# Altium PCB PCB GYRO REPETE-REVISI.PcbDoc
Units mm, origin at the board's own origin, x right, y up, seen from the top; angles counter-clockwise.
Board outline 122.05 x 86.61 mm, 2 copper layers (Top Layer, Bottom Layer); 63 components, 57 nets, 236 pads, 10 vias.
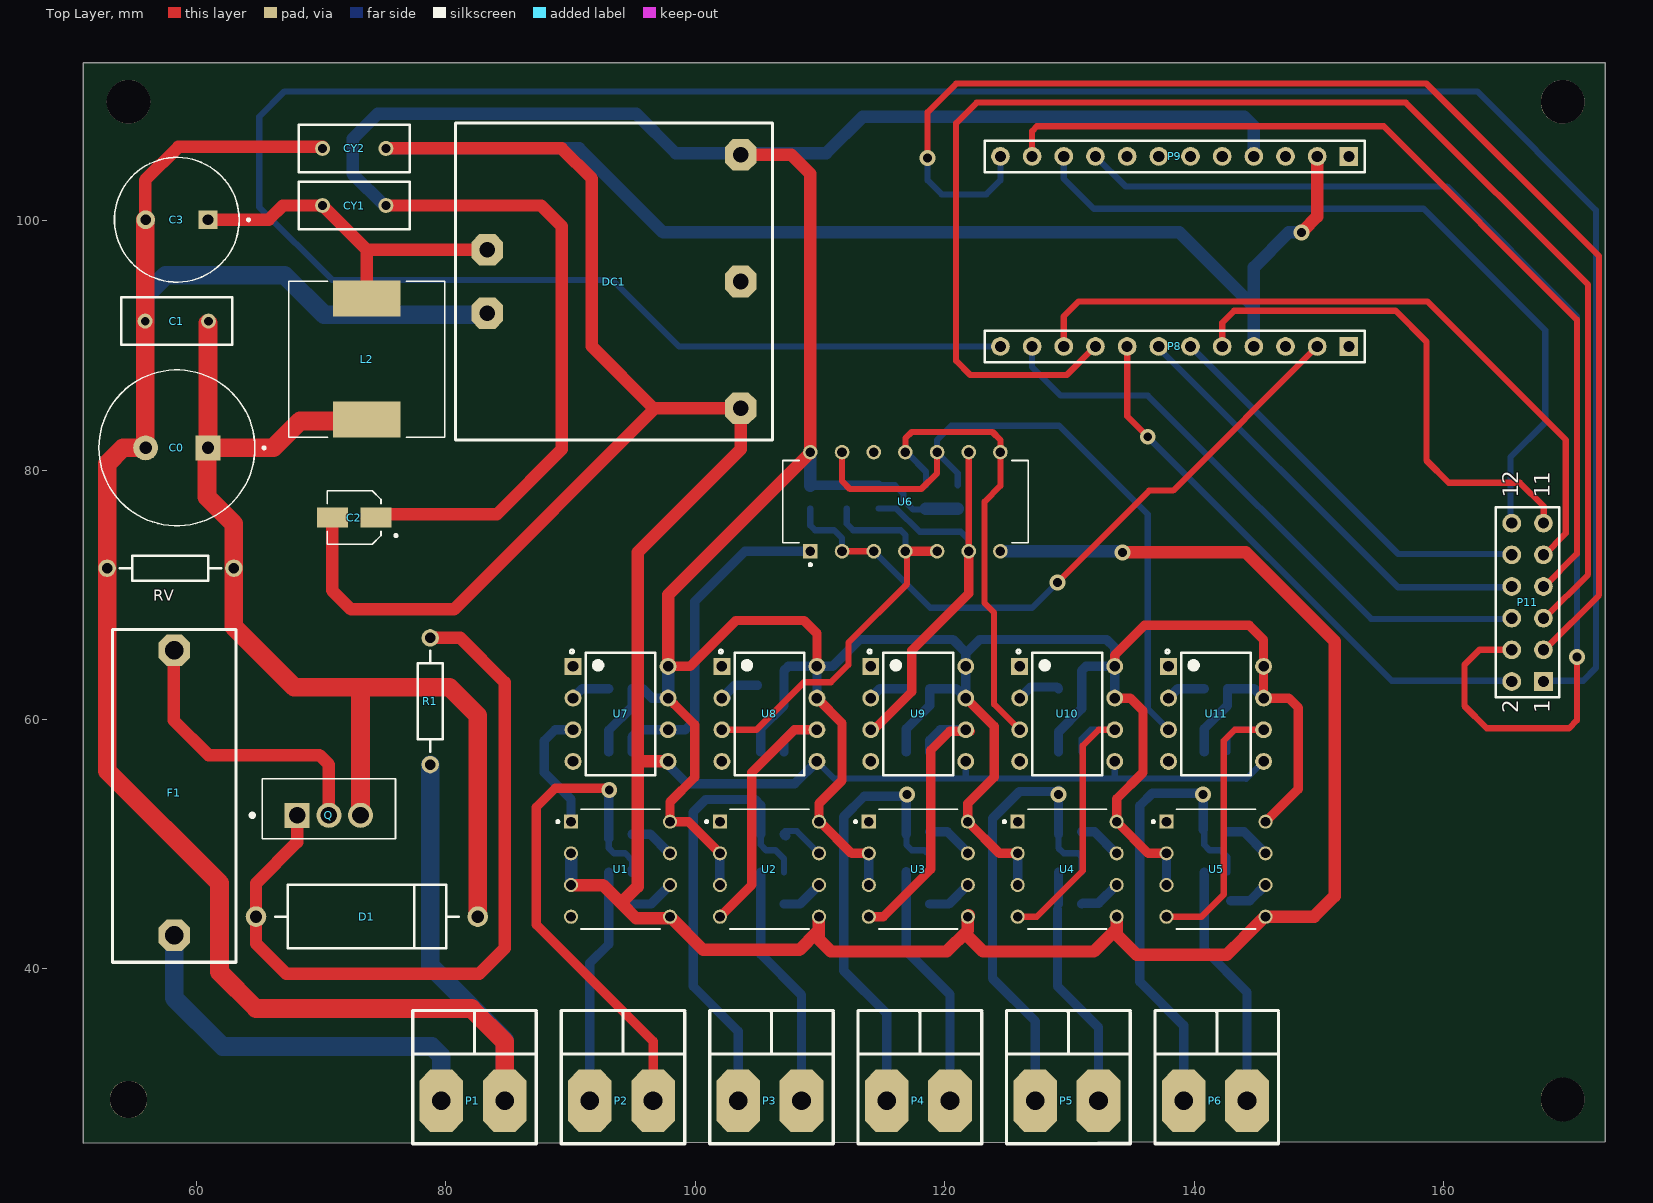
[diagram p0: Top Layer view]
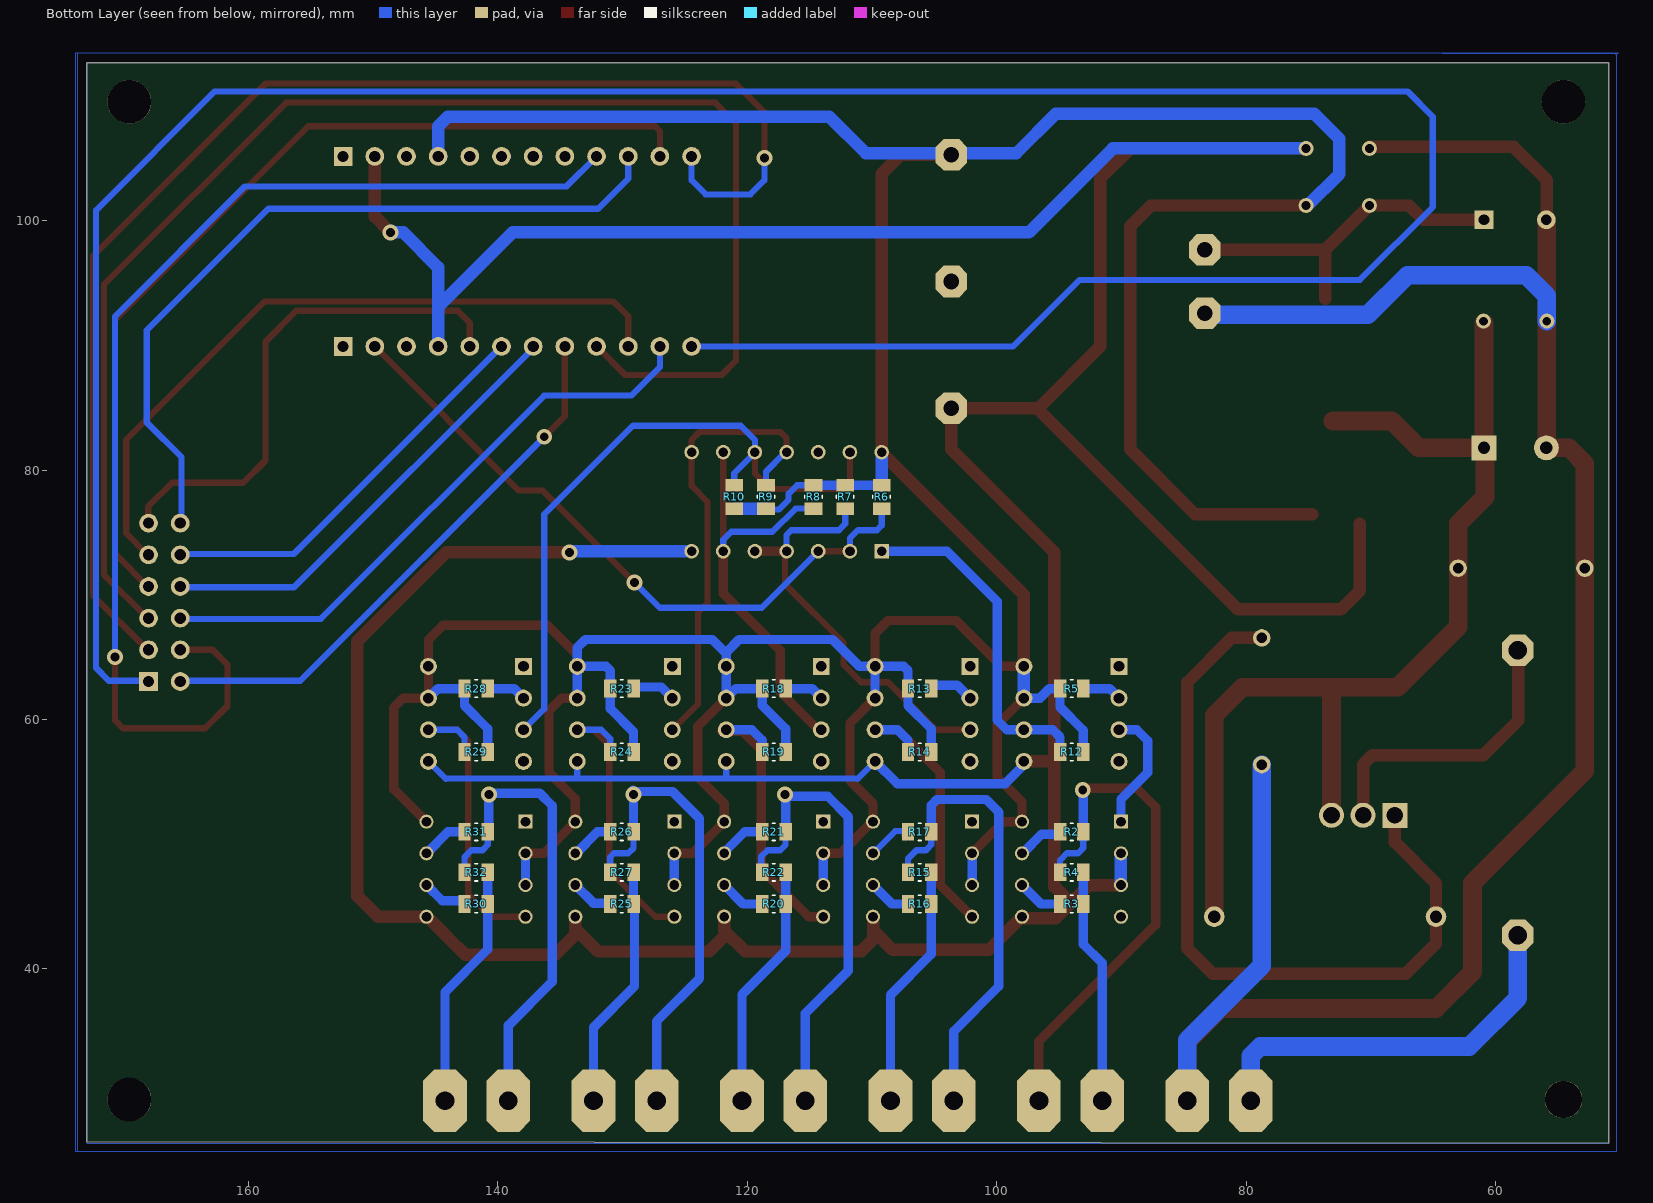
[diagram p1: Bottom Layer view, seen from below]

## Layer stack, top to bottom
Top Layer: signal copper 0.0356
Dielectric: dielectric 0.32, FR-4, Dk 4.8
Bottom Layer: signal copper 0.0356

## Board outline
172.974,112.649 172.974,26.161 50.927,26.035 50.927,112.649

## Design rules (kind name [scope] priority, off if disabled: settings)
Clearance Clearance_1 [All] p1: gap=0.254
Clearance [All] p2: gap=0.254
Height [All] p1: minheight=0 maxheight=76 prefheight=12.7
HoleSize [All] p1: absolutevalues=TRUE maxlimit=3.5 minlimit=0.025 maxpercent=80.000 minpercent=20.000
PolygonConnect [All] p1: connectstyle=Relief reliefconductorwidth=0.254 reliefentries=4 polygonreliefangle="90 Angle"
RoomDefinition "PCB GYRO REPETER" [InComponentClass('PCB GYRO REPETER')] p1: confinementstyle=ConfineIn formatcopy=TRUE lockcomponents=FALSE outline 186.817,18.161 41.91,18.161 41.91,120.904 186.817,120.904
RoutingVias [All] p1: holewidth=0.711 width=1.27 viastyle="Through Hole" minholewidth=0.711 minwidth=1.27 maxholewidth=0.711 maxwidth=1.27
SilkToSilkClearance [All] p1: silktosilkclearance=0.104
SilkscreenOverComponentPads [All] p1: minsilkscreentomaskgap=0.104
SolderMaskExpansion [All] p1: expansion=0.116
Width [All] p1: maxlimit=2 minlimit=0.254 preferedwidth=0.5 minimp=50.000000 maximp=50.000000 favimp=50.000000
24 further rules are at their usual default settings.

## Components (designator, comment, footprint, x,y, rotation, side; value= is the part's Value field where it differs from the comment)
C0 "1000uf 50" CAPPRD500W60D1250H2500 58.42,81.788 r180 top
C1 "Cap" RAD-0.2 58.42,91.948 r0 top
C2 "EEEFP1C100AR" CAP_EEEFP1C100AR 72.644,76.2 r180 top
C3 "330uf50" CAPPRD500W60D1000H2000 58.42,100.076 r180 top
CY1 "Cap" RAD-0.2 72.644,101.219 r180 top
CY2 "Cap" RAD-0.2 72.644,105.791 r180 top
D1 "D Zener" DIODE-0.7 73.66,44.196 r0 top
DC1 "MORNSUN DC DC" "DC DC MORNSUN" 85.344,95.504 r0 top
F1 "FUSE-HOLDER" Fuse-Holder 46.228,50.8 r0 top
L2 "SRR1240-101M" IND_SRR1240-101M 73.66,88.9 r270 top
P1 "PWR" Terminal-blok 6.6,97.5 r0 top
P2 "INPUT" Terminal-blok 18.505,97.5 r0 top
P3 "OUT-1" Terminal-blok 30.409,97.5 r0 top
P4 "OUT-2" Terminal-blok 42.314,97.5 r0 top
P5 "OUT-3" Terminal-blok 54.22,97.5 r0 top
P6 "OUT-4" Terminal-blok 66.124,97.5 r0 top
P8 "Header 12" HDR1X12 152.4,89.916 r180 top
P9 "Header 12" HDR1X12 152.4,105.156 r180 top
P11 "Header 6X2" HDR2X6 168,63.05 r90 top
Q "FQP47P06" TO254P1067X483X2286-3 68.072,52.324 r0 top
R1 "Res2" AXIAL-0.4 78.74,61.468 r90 top
R2 "1623401-1" RESC2012X65N 93.98,51 r0 bottom
R3 "1623401-1" RESC2012X65N 93.98,45.212 r0 bottom
R4 "1623401-1" RESC2012X65N 93.98,47.752 r180 bottom
R5 "1623401-1" RESC2012X65N 93.98,62.484 r0 bottom
R6 "1623401-1" RESC2012X65N 109.22,77.851 r90 bottom
R7 "1623401-1" RESC2012X65N 112.141,77.851 r90 bottom
R8 "1623401-1" RESC2012X65N 114.681,77.851 r90 bottom
R9 "1623401-1" RESC2012X65N 118.491,77.851 r270 bottom
R10 "1623401-1" RESC2012X65N 121.031,77.851 r270 bottom
R12 "1623401-1" RESC2012X65N 93.98,57.404 r180 bottom
R13 "1623401-1" RESC2012X65N 106.172,62.484 r0 bottom
R14 "1623401-1" RESC2012X65N 106.172,57.404 r180 bottom
R15 "1623401-1" RESC2012X65N 106.172,47.752 r0 bottom
R16 "1623401-1" RESC2012X65N 106.172,45.212 r180 bottom
R17 "1623401-1" RESC2012X65N 106.172,51 r180 bottom
R18 "1623401-1" RESC2012X65N 117.856,62.484 r0 bottom
R19 "1623401-1" RESC2012X65N 117.856,57.404 r180 bottom
R20 "1623401-1" RESC2012X65N 117.856,45.212 r180 bottom
R21 "1623401-1" RESC2012X65N 117.856,51 r180 bottom
R22 "1623401-1" RESC2012X65N 117.856,47.752 r0 bottom
R23 "1623401-1" RESC2012X65N 130.048,62.484 r0 bottom
R24 "1623401-1" RESC2012X65N 130.048,57.404 r180 bottom
R25 "1623401-1" RESC2012X65N 130.048,45.212 r180 bottom
R26 "1623401-1" RESC2012X65N 130.048,51 r180 bottom
R27 "1623401-1" RESC2012X65N 130.048,47.752 r0 bottom
R28 "1623401-1" RESC2012X65N 141.732,62.484 r180 bottom
R29 "1623401-1" RESC2012X65N 141.732,57.404 r0 bottom
R30 "1623401-1" RESC2012X65N 141.732,45.212 r0 bottom
R31 "1623401-1" RESC2012X65N 141.732,51 r0 bottom
R32 "1623401-1" RESC2012X65N 141.732,47.752 r180 bottom
RV "Res Varistor" AXIAL-0.4 57.912,72.136 r0 top
U1 "SN75176BP" DIP794W45P254L959H508Q8 94,48 r0 top
U2 "SN75176BP" DIP794W45P254L959H508Q8 105.938,48 r0 top
U3 "SN75176BP" DIP794W45P254L959H508Q8 117.874,48 r0 top
U4 "SN75176BP" DIP794W45P254L959H508Q8 129.812,48 r0 top
U5 "SN75176BP" DIP794W45P254L959H508Q8 141.75,48 r0 top
U6 "SN7407N" DIP794W45P254L1969H508Q14 116.84,77.47 r90 top
U7 "6N137" DIP762W50P254L977H451Q8 94,60.452 r0 top
U8 "6N137" DIP762W50P254L977H451Q8 105.938,60.452 r0 top
U9 "6N137" DIP762W50P254L977H451Q8 117.874,60.452 r0 top
U10 "6N137" DIP762W50P254L977H451Q8 129.812,60.452 r0 top
U11 "6N137" DIP762W50P254L977H451Q8 141.75,60.452 r0 top

## Footprints (in the part's own frame and the unit in brackets; to place one, negate y for a bottom-side part, rotate by r counter-clockwise, add the part's x,y. Pads: shape width x height; smd on the part's side, far side on the other; paste and mask are expansions set on the pad)
AXIAL-0.4 [mm] "Axial Device, Thru-Hole; 2 Leads; 0.4 in Pin Spacing"
  round 1.4 hole 0.85: 1(-5.08,0) 2(5.08,0)
  silkscreen extent -4.06,-1.02 4.06,1.02
CAP_EEEFP1C100AR [mm]
  rect 2.5x1.6 smd: 1(-1.75,0) 2(1.75,0)
  silkscreen extent -3.45,-2.15 2.15,2.15, body extent -2.5,-2.15 2.5,2.15, height 5.3
CAPPRD500W60D1000H2000 [mm]
  round 1.5 hole 0.85: N(2.5,0)
  rect 1.5x1.5 hole 0.85: P(-2.5,0)
  silkscreen extent -5.85,-5 5,5, body extent -5,-5 5,5, height 20
CAPPRD500W60D1250H2500 [mm]
  round 2 hole 1: N(2.5,0)
  rect 2x2 hole 1: P(-2.5,0)
  silkscreen extent -7.1,-6.25 6.25,6.25, body extent -6.25,-6.25 6.25,6.25, height 25
"DC DC MORNSUN" [mil]
  oct 100x100 hole 49.21: 1(-80,-115) 2(-80,85) 3(720,385) 4(720,-15) 5(720,-415)
  silkscreen extent -180,-515 820,485
DIODE-0.7 [mm] "Diode, Thru-Hole; 2 Leads; 0.7 in Pin Spacing"
  round 1.65 hole 1: 1(-8.89,0) 2(8.89,0)
  silkscreen extent -7.37,-2.54 7.37,2.54
DIP762W50P254L977H451Q8 [mm]
  rect 1.35x1.35 hole 0.85: 1(-3.81,3.81)
  round 1.35 hole 0.85: 2(-3.81,1.27) 3(-3.81,-1.27) 4(-3.81,-3.81) 5(3.81,-3.81) 6(3.81,-1.27) 7(3.81,1.27) 8(3.81,3.81)
  silkscreen extent -4.04,-4.9 2.8,5.14
DIP794W45P254L959H508Q8 [mm]
  rect 1.13x1.13 hole 0.78: 1(-3.97,3.81)
  round 1.13 hole 0.78: 2(-3.97,1.27) 3(-3.97,-1.27) 4(-3.97,-3.81) 5(3.97,-3.81) 6(3.97,-1.27) 7(3.97,1.27) 8(3.97,3.81)
  silkscreen extent -5.13,-4.79 3.17,4.79, body extent -4.79,-5.46 4.79,5.46, height 5.08
DIP794W45P254L1969H508Q14 [mm]
  rect 1.17x1.17 hole 0.77: 1(-3.97,7.62)
  round 1.17 hole 0.77: 2(-3.97,5.08) 3(-3.97,2.54) 4(-3.97,0) 5(-3.97,-2.54) 6(-3.97,-5.08) 7(-3.97,-7.62) 8(3.97,-7.62) 9(3.97,-5.08) 10(3.97,-2.54) 11(3.97,0) 12(3.97,2.54) 13(3.97,5.08) 14(3.97,7.62)
  silkscreen extent -5.15,-9.84 3.3,9.84
Fuse-Holder [mm]
  oct 2.5x2.5 hole 1.5: 1(11.99,14.764) 2(11.99,-8.096)
  silkscreen extent 7.04,-10.26 16.94,16.41
HDR1X12 [mm] "Connector; Header; 12 Position"
  rect 1.5x1.5 hole 0.9: 1(0,0)
  round 1.5 hole 0.9: 2(2.54,0) 3(5.08,0) 4(7.62,0) 5(10.16,0) 6(12.7,0) 7(15.24,0) 8(17.78,0) 9(20.32,0) 10(22.86,0) 11(25.4,0) 12(27.94,0)
  silkscreen extent -1.27,-1.27 29.21,1.27
HDR2X6 [mm] "Connector; Header; 6x2 Position"
  rect 1.5x1.5 hole 0.9: 1(0,0)
  round 1.5 hole 0.9: 2(0,2.54) 3(2.54,0) 4(2.54,2.54) 5(5.08,0) 6(5.08,2.54) 7(7.62,0) 8(7.62,2.54) 9(10.16,0) 10(10.16,2.54) 11(12.7,0) 12(12.7,2.54)
  silkscreen extent -1.27,-1.27 13.97,3.81
IND_SRR1240-101M [mm]
  rect 2.9x5.4 smd: 1(-4.85,0) 2(4.85,0)
  silkscreen extent -6.25,-6.25 6.25,6.25
RAD-0.2 [mm] "Radial Cap, Thru-Hole; 2 Leads; 0.2 in Pin Spacing"
  round 1.2 hole 0.7: 1(-2.54,0) 2(2.54,0)
  silkscreen extent -4.44,-1.91 4.44,1.91
RESC2012X65N [mm]
  rect 1x1.42 smd: 1(-0.935,0) 2(0.935,0)
  silkscreen extent -0.12,-0.7 0.12,0.7
Terminal-blok [mm]
  oct 3.5x5 hole 1.5: 1(73.025,-68.072) 2(78.105,-68.072)
  silkscreen extent 70.74,-71.51 80.64,-60.83
TO254P1067X483X2286-3 [mm]
  rect 2.01x2.01 hole 1.34: 1(0,0)
  round 2.01 hole 1.34: 2(2.54,0) 3(5.08,0)
  silkscreen extent -3.74,-1.89 7.88,2.95

## Part data
C0: library part EEUHD1H102B, "CAP ALUM 1000UF 20% 50V RADIAL"
C1 CY1 CY2: "Capacitor"
C2: "10µF 16V Aluminum Electrolytic Capacitors Radial, Can - SMD 850mOhm @ 100kHz 2000 Hrs @ 105°C"
C3: library part EEUFS1H331B, "CAP ALUM 330UF 20% 50V RADIAL"
D1: "Zener Diode"
DC1: library part "DC-DC MORNSUN"
L2: "100µH Shielded Wirewound Inductor 1.25A 300mOhm Max Nonstandard"
P1 P2 P3 P4 P5 P6: library part "Header 2", "Header, 2-Pin"
P8 P9: "Header, 12-Pin"
P11: "Header, 6-Pin, Dual row"
Q: "P-Channel 60V 47A _Tc_ 160W _Tc_ Through Hole TO-220-3"
R1: "Resistor"
R2 R3 R4 R5 R6 R7 R8 R9 R10 R12 R13 R14 R15 R16 R17 R18 R19 R20 R21 R22 R23 R24 R25 R26 R27 R28 R29 R30 R31 R32: library part CRG0805ZR, "Res Thick Film 0805 0 Ohm Molded SMD SMD T/R"
RV: "Varistor (Voltage-Sensitive Resistor)"
U1 U2 U3 U4 U5: "Differential bus transceiver 8-PDIP 0 to 70"
U6: "Búferes / controladores hexagonales con salidas de alto voltaje de colector abierto 14-PDIP 0 a 70"
U7 U8 U9 U10 U11: "Optoaislador de salida lógica 10Mbps Open Collector 5000Vrms 1 Channel 5kV / µs CMTI 8-DIP"

## Free pads (board coordinates)
  round 3 hole 3: 0(54.545,29.535)
  round 3.5 hole 3.5: 0(54.545,109.535) 0(169.54,29.535) 0(169.54,109.535)

## Via types
v1: diameter 1.27, hole 0.711, Top Layer to Bottom Layer, 9 vias
v2: diameter 1.27, hole 0.711, Top Layer to Bottom Layer, tented both sides, 1 vias

## Nets (pads, with @x,y where several pads share a name; then routed paths per layer and width w, separated by ;. In a path a pad name is that pad's centre, name@x,y a point inside that pad or via, vN(x,y) a via of type N, cw(c..) or ccw(c..) an arc to the next point about the centre after c; other vN are vias at no path point)
-VIN: C0.N C1.1 C3.N CY2.2 DC1.1 P1.2 R1.1 RV.1 | length 176.7
  Top Layer w1: C3.N@55.88,99.949 55.88,100.076 55.88,103.251 58.547,105.918 CY2.2@70.104,105.918
  Top Layer w1.5: RV.1@52.832,71.882 52.832,55.88 61.849,46.863 61.849,39.751 64.77,36.83 82.042,36.83 84.705,34.167 P1.2 P1.2@84.705,28.928 ; RV.1 52.832,80.518 54.102,81.788 C0.N@56.007,81.788 ; C0.N@55.88,81.788 C1.1 C3.N@55.88,100.076
  Bottom Layer w1.5: C1.1 55.88,93.98 57.531,95.631 67.056,95.631 70.231,92.456 DC1.1@83.312,92.456 ; R1.1 78.74,40.259 84.705,34.294 P1.2@84.705,28.928
A: P9.9 P11.4 | length 93.9
  Top Layer w0.5: P11.4 162.872,65.59 161.671,64.389 161.671,61.087 163.449,59.309 170.053,59.309 170.688,59.944 v1(170.688,65.024)
  Bottom Layer w0.5: P9.9 134.493,102.743 160.274,102.743 170.688,92.329 v1(170.688,65.024)
B: P9.10 P11.12 | length 62
  Bottom Layer w0.5: P9.10 129.54,103.378 131.953,100.965 158.392,100.965 168.148,91.209 168.148,83.82 165.354,81.026 P11.12@165.354,75.819
C: P9.11 P11.7 | length 74.9
  Top Layer w0.5: P9.11 127,107.188 127.381,107.569 155.194,107.569 170.688,92.075 170.688,73.279 P11.7@168.021,70.612
D: P9.12 P11.3 | length 108.5
  Top Layer w0.5: v1@118.618,104.902 v1(118.618,105.029) 118.618,108.712 120.904,110.998 158.623,110.998 172.466,97.155 172.466,69.977 168.148,65.659 P11.3@167.767,65.659
  Bottom Layer w0.5: v1(118.618,105.029) 118.618,103.251 119.761,102.108 123.317,102.108 124.46,103.251 P9.12
DATA-IN: R12.1 U6.1 U7.6 | length 27.3
  Bottom Layer w0.75: R12.1 94.915,58.593 95.504,59.182 U7.6 99.187,59.182 99.949,59.944 99.949,69.469 103.98,73.5 U6.1 U6.1@109.22,73.533
DATA_OUT1: P8.2 R6.1 U6.2 U6.3 | length 53.4
  Top Layer w0.5: U6.2 U6.3@114.206,73.5 ; v1@129.286,71.247 136.398,78.359 138.303,78.359 P8.2
  Bottom Layer w0.5: R6.1 109.22,75.565 109.601,75.184 111.125,75.184 111.76,74.549 U6.2@111.76,73.533 ; U6.3 118.839,68.961 127,68.961 v1@128.905,70.866
  other v1: 129.032,70.993
DATA_OUT2: R7.1 U6.4 U6.5 U8.3 | length 33.6
  Top Layer w0.5: U8.3 104.902,59.182 108.712,62.992 110.871,62.992 112.268,64.389 112.268,66.167 116.967,70.866 116.967,73.5 U6.4@116.967,73.533
  Top Layer w0.75: U6.4 116.967,73.5 U6.5@119.347,73.5
  Bottom Layer w0.5: R7.1 112.141,75.692 112.649,75.184 116.459,75.184 116.84,74.803 U6.4 U6.4@116.84,73.406
DATA_OUT3: R8.1 U6.6 U6.9 U9.3 | length 34.6
  Top Layer w0.5: U6.6@121.92,73.406 U6.6 U6.9
  Top Layer w0.75: U9.3 114.3,59.182 117.348,62.23 117.348,65.532 121.92,70.104 U6.6@121.92,73.406 ; U6.6 U6.6@121.92,73.533
  Bottom Layer w0.5: R8.1 116.124,76.916 117.983,75.057 121.285,75.057 121.92,74.422 U6.6@121.92,73.787
DATA_OUT4: R9.1 U6.8 U6.11 U10.3 | length 37.1
  Top Layer w0.5: U6.11 116.84,82.55 117.348,83.058 123.825,83.058 124.46,82.423 U6.8@124.46,81.534 ; U6.8@124.46,81.407 124.46,78.74 123.19,77.47 123.19,69.342 123.952,68.58 123.952,61.232 U10.3
  Bottom Layer w0.5: U6.11@117.094,81.28 118.491,79.883 R9.1
DATA_OUT5: R10.1 U6.10 U6.13 U11.3 | length 54.9
  Top Layer w0.5: U6.13@111.76,81.407 111.76,79.121 112.395,78.486 118.11,78.486 119.38,79.756 U6.10
  Bottom Layer w0.5: U6.10 119.38,82.423 120.523,83.566 129.159,83.566 136.271,76.454 136.271,73.914 ; U6.10@119.507,81.28 121.031,79.756 R10.1 ; 136.271,74.041 136.271,73.914 ; U11.3 136.271,60.851 136.271,73.914
DIG1: P8.8 P11.2 | length 45.1
  Top Layer w0.5: P8.8 134.62,84.328 136.207,82.74 v2@136.334,82.74
  Bottom Layer w0.5: v2@136.334,82.614 155.829,63.119 P11.2@165.354,63.119
  other v2: 136.271,82.677
DIG2: P8.7 P11.8 | length 36.4
  Bottom Layer w0.5: P8.7 137.16,89.789 156.337,70.612 P11.8@165.481,70.612
DIG3: P8.6 P11.10 | length 32.7
  Bottom Layer w0.5: P8.6 156.337,73.279 P11.10@165.481,73.279
DIG4: P8.5 P11.11 | length 41.6
  Top Layer w0.5: P8.5 142.24,91.821 143.192,92.773 156.147,92.773 158.623,90.297 158.623,80.772 160.401,78.994 166.116,78.994 168.021,77.089 P11.11@168.021,75.692
DP: P8.9 P11.5 | length 117.4
  Top Layer w0.5: P8.9 129.794,87.63 122.047,87.63 120.904,88.773 120.904,107.823 122.555,109.474 156.972,109.474 171.577,94.869 171.577,71.628 168.148,68.199 P11.5@167.894,68.199
E: P8.12 P11.1 | length 224.6
  Bottom Layer w0.5: P8.12 98.679,89.916 93.345,95.25 70.866,95.25 65.024,101.092 65.024,108.331 67.056,110.363 162.687,110.363 172.212,100.838 172.212,64.135 171.196,63.119 P11.1@168.021,63.119
F: P8.11 P11.6 | length 48.5
  Bottom Layer w0.5: P8.11 127,88.265 129.286,85.979 136.271,85.979 154.178,68.072 P11.6@165.481,68.072
G: P8.10 P11.9 | length 57.8
  Top Layer w0.5: P8.10 129.54,92.329 130.738,93.527 158.695,93.527 169.799,82.423 169.799,74.93 P11.9@168.021,73.152
GND: C2.2 CY2.1 DC1.5 P8.4 P9.2 U1.2 U1.3 U1.5 U2.5 U3.5 U4.5 U5.5 U6.7 U7.5 U8.5 U9.5 U10.5 U11.5 | length 401
  Top Layer w1: C2.2@70.866,75.692 70.866,70.358 72.39,68.834 80.645,68.834 96.774,84.963 ; CY2.1 89.281,105.791 91.694,103.378 91.694,89.916 96.647,84.963 96.774,84.963 ; U1.3 92.589,46.73 94.043,45.276 ; 95.377,53.086 95.377,46.609 94.043,45.276 ; 95.377,53.213 95.377,56.642 ; U1.5@97.849,44.069 95.25,44.069 94.043,45.276 ; U7.5@97.917,56.642 U7.5 95.377,56.642 ; U1.5 100.631,41.529 108.331,41.529 109.728,42.926 ; U2.5 109.908,42.365 110.871,41.402 120.142,41.402 121.844,43.104 U3.5 ; 121.844,42.621 123.063,41.402 131.953,41.402 133.731,43.18 ; U3.5@121.92,44.19 U3.5@121.92,44.323 ; U4.5@133.731,44.19 U4.5@133.731,44.196 ; U4.5 133.782,42.748 135.382,41.148 142.621,41.148 144.018,42.545 ; v1@134.239,73.279 134.366,73.406 144.145,73.406 151.257,66.294 151.257,45.847 149.606,44.196 145.669,44.196 144.145,42.672 ; v1@148.717,99.187 149.86,100.33 P9.2 ; 95.377,56.642 95.377,73.406 103.632,81.661 DC1.5 96.774,84.963
  Bottom Layer w0.5: U8.5 111.145,55.245 ; 111.179,55.279 133.622,55.279 ; 121.684,55.449 U9.5 ; U10.5 133.622,55.279 ; 144.129,55.279 133.622,55.279 ; 144.163,55.245 U11.5
  Bottom Layer w0.75: U7.5@97.81,56.495 U7.5 97.81,56.368 99.314,54.864 107.97,54.864 U8.5
  Bottom Layer w1: CY2.1 90.678,105.791 97.409,99.06 138.811,99.06 144.78,93.091 ; U1.3 U1.2 ; U6.7 v1@134.018,73.5 ; P8.4 144.78,93.091 ; v1@148.59,99.187 v1(148.59,99.06) 147.574,99.06 144.78,96.266 144.78,93.091
  other v1: 134.239,73.406
NetC0_P: C0.P C1.2 D1.2 L2.2 Q.3 RV.2 | length 87.3
  Top Layer w1.5: C1.2@60.92,91.781 C0.P@60.92,81.875 ; C0.P@60.96,81.915 C0.P@60.92,81.875 ; L2.2@73.025,83.947 68.326,83.947 66.167,81.788 C0.P C0.P@60.92,81.875 ; Q.3 73.152,62.588 ; D1.2 82.55,60.325 80.287,62.588 73.152,62.588 ; C0.P@60.92,81.875 60.833,81.788 60.833,77.851 62.992,75.692 RV.2 62.992,67.437 67.841,62.588 73.152,62.588
NetC3_P: C3.P CY1.2 DC1.2 L2.1 | length 28.3
  Top Layer w1: C3.P@60.96,100.076 65.786,100.076 66.929,101.219 CY1.2 73.787,97.536 ; L2.1 73.66,97.663 ; 73.787,97.663 DC1.2@83.185,97.663 ; DC1.2@83.185,97.536 DC1.2
NetD1_1: D1.1 Q.1 R1.2 | length 62.2
  Top Layer w1: Q.1 68.072,50.165 64.77,46.863 D1.1 64.77,42.037 67.183,39.624 82.677,39.624 84.709,41.656 84.709,62.992 81.153,66.548 R1.2
NetF1_1: F1.1 Q.2 | length 23.6
  Top Layer w1: F1.1@58.166,65.532 58.166,59.944 60.96,57.15 69.85,57.15 70.612,56.388 Q.2
NetF1_2: F1.2 P1.1 | length 32.5
  Bottom Layer w1.5: F1.2 58.218,37.667 62.103,33.782 78.867,33.782 79.625,33.024 P1.1@79.625,28.928
NetP2_1: P2.1 R3.1 R4.2 | length 19.5
  Bottom Layer w0.75: P2.1@91.53,28.928 91.53,40.476 93.045,41.991 R3.1 R4.2
NetP2_2: P2.2 R2.1 R4.1 | length 42.3
  Top Layer w0.75: v1@92.964,54.483 88.773,54.483 87.249,52.959 87.249,43.561 96.61,34.2 P2.2@96.61,28.928 ; v1(93.091,54.356) v1@93.345,54.356
  Bottom Layer w0.5: R2.1@93.045,50.465 93.045,49.703 93.472,49.276 94.361,49.276 94.915,48.722 R4.1
  Bottom Layer w0.75: R2.1@93.045,50.465 93.045,50.8 v1@93.045,54.056 ; R4.1 R4.1@94.915,47.982
NetP3_1: P3.1 R15.2 R17.2 | length 37.8
  Bottom Layer w0.5: R17.2@105.237,50.8 105.237,49.957 105.664,49.53 106.426,49.53 107.107,48.849 R15.2
  Bottom Layer w0.75: P3.1@103.434,28.928 103.434,34.996 99.822,38.608 99.822,52.578 100.838,53.594 104.775,53.594 105.237,53.132 R17.2@105.237,50.8
NetP3_2: P3.2 R15.1 R16.2 | length 20.2
  Bottom Layer w0.75: R15.1 R16.2 105.237,41.194 108.514,37.917 P3.2@108.514,28.928
NetP4_1: P4.1 R21.2 R22.2 | length 37.9
  Bottom Layer w0.5: R21.2 116.921,49.957 117.348,49.53 118.364,49.53 118.872,49.022 118.872,48.133 R22.2@118.745,48.006
  Bottom Layer w0.75: P4.1@115.339,28.928 115.339,36.426 111.887,39.878 111.887,52.197 113.538,53.848 v1@116.459,53.848 ; R21.2@116.921,50.8 R21.2 v1@116.921,54.056 ; v1@116.967,53.848 v1@116.967,54.102
  other v1: 116.967,54
NetP4_2: P4.2 R20.2 R22.1 | length 20.3
  Bottom Layer w0.75: R22.1@116.921,47.798 R22.1 R20.2 116.921,41.448 120.419,37.95 P4.2@120.419,28.928
NetP5_1: P5.1 R26.2 R27.2 | length 38.7
  Bottom Layer w0.5: R26.2 129.113,49.703 129.54,49.276 130.683,49.276 130.983,48.976 R27.2
  Bottom Layer w0.75: P5.1@127.245,28.928 127.245,35.823 123.825,39.243 123.825,52.07 125.984,54.229 v1@128.778,54.229 ; R26.2@129.113,50.8 R26.2 129.113,54.31 v1@129.159,54.356
  other v1: 129.113,54
NetP5_2: P5.2 R25.2 R27.1 | length 19.8
  Bottom Layer w0.75: R25.2@129.032,44.785 129.032,38.608 132.325,35.315 P5.2@132.325,28.928 ; R25.2 R27.1
NetP6_1: P6.1 R31.1 R32.1 | length 38.6
  Bottom Layer w0.5: R31.1 140.797,49.957 141.224,49.53 142.113,49.53 142.667,48.976 R32.1
  Bottom Layer w0.75: P6.1@139.149,28.928 139.149,35.476 135.636,38.989 135.636,53.086 136.652,54.102 140.716,54.102 R31.1@140.716,51.173
  other v1: 140.716,54
NetP6_2: P6.2 R30.1 R32.2 | length 20.2
  Bottom Layer w0.75: R32.2 R30.1 140.797,41.575 144.229,38.143 P6.2@144.229,28.928
NetR2_2: R2.2 U1.7 | length 3.7
  Bottom Layer w0.75: R2.2@94.915,50.8 96.393,50.8 97.923,49.27 U1.7
NetR3_2: R3.2 U1.6 | length 3.7
  Bottom Layer w0.75: R3.2 96.452,45.212 U1.6
NetR5_1: R5.1 U7.2 | length 3.2
  Bottom Layer w0.75: U7.2 90.19,61.742 90.932,62.484 R5.1
NetR13_1: R13.1 U8.2 | length 3.6
  Bottom Layer w0.75: U8.2@102.489,61.722 U8.2 103.144,62.738 R13.1@104.983,62.738
NetR16_1: R16.1 U2.6 | length 3.4
  Bottom Layer w0.75: R16.1 108.39,45.212 U2.6
NetR17_1: R17.1 U2.7 | length 3.7
  Bottom Layer w0.5: R17.1@107.188,51.054 108.124,51.054 U2.7
  Bottom Layer w0.75: R17.1@107.107,50.8 R17.1@107.234,50.673
  Bottom Layer w1: U2.7 U2.7@109.908,49.35
NetR18_1: R18.1 U9.2 | length 3.2
  Bottom Layer w0.75: U9.2 114.064,61.74 114.808,62.484 R18.1
NetR20_1: R20.1 U3.6 | length 3.7
  Bottom Layer w0.75: R20.1 120.326,45.212 U3.6
NetR21_1: R21.1 U3.7 | length 3.8
  Bottom Layer w0.75: R21.1 120.196,51 121.844,49.352 U3.7
NetR23_1: R23.1 U10.2 | length 3.5
  Bottom Layer w0.75: U10.2 126.891,62.611 128.986,62.611 R23.1
NetR25_1: R25.1 U4.6 | length 3.4
  Bottom Layer w0.75: R25.1 131.053,45.282 132.334,45.282 U4.6
NetR26_1: R26.1 U4.7 | length 3.5
  Bottom Layer w0.75: R26.1 132.007,51 U4.7@133.737,49.27
NetR28_2: R28.2 U11.2 | length 3.2
  Bottom Layer w0.75: U11.2 138.702,62.484 R28.2
NetR30_2: R30.2 U5.6 | length 3.3
  Bottom Layer w0.75: R30.2@142.921,45.466 144.456,45.466 U5.6
NetR31_2: R31.2 U5.7 | length 3.8
  Bottom Layer w0.75: R31.2 143.99,51 U5.7
NetU1_1: U1.1 U7.3 | length 10
  Bottom Layer w0.75: U1.1 90.03,53.607 87.884,55.753 87.884,58.293 88.773,59.182 U7.3
TX-D: P8.1
TX-OUT1: R14.1 U2.4 U8.6 | length 23.2
  Top Layer w0.75: U2.4 104.521,46.743 104.521,55.753 107.95,59.182 U8.6
  Bottom Layer w0.75: R14.1 107.107,58.339 107.95,59.182 U8.6
TX-OUT2: R19.1 U3.4 U9.6 | length 24.1
  Top Layer w0.75: U3.4 115.056,44.19 118.872,48.006 118.872,57.531 120.396,59.055 U9.6@122.047,59.055
  Bottom Layer w0.75: R19.1 118.791,58.339 119.634,59.182 U9.6
TX-OUT3: R24.1 U4.4 U10.6 | length 23.9
  Top Layer w0.5: U4.4 127.375,44.19 131.064,47.879 131.064,57.912 132.334,59.182 U10.6
  Bottom Layer w0.5: R24.1 130.983,58.466 131.699,59.182 U10.6
TX-OUT4: R29.2 U5.4 U11.6 | length 25.5
  Top Layer w0.5: U5.4 140.583,44.19 142.367,45.974 142.367,58.293 143.256,59.182 U11.6
  Bottom Layer w0.5: R29.2 142.667,58.593 143.256,59.182 U11.6
VCC: C2.1 CY1.1 DC1.3 P9.4 R5.2 R6.2 R7.2 R8.2 R9.2 R10.2 R12.2 R13.2 R14.2 R18.2 R19.2 R23.2 R24.2 R28.1 R29.1 U1.8 U2.2 U2.3 U2.8 U3.2 U3.3 U3.8 U4.2 U4.3 U4.8 U5.2 U5.3 U5.8 U6.14 U7.7 U7.8 U8.7 U8.8 U9.7 U9.8 U10.7 U10.8 U11.7 U11.8 | length 411.6
  Top Layer w0.75: U7.8@97.917,64.262 99.568,64.262 103.251,67.945 108.712,67.945 109.748,66.909 U8.8 ; 98.308,61.224 99.949,59.583 99.949,55.372 97.97,53.393 U1.8 99.447,51.81 U2.2@101.968,49.289 ; U8.7 111.76,59.71 111.76,55.118 109.908,53.266 U2.8 109.988,51.81 112.528,49.27 U3.2 ; U9.7 123.952,59.454 123.952,55.372 121.844,53.264 U3.8 124.384,49.27 U4.2 ; U10.8 133.622,65.169 136.017,67.564 144.399,67.564 145.56,66.403 U11.8 U11.7 147.574,61.722 148.336,60.96 148.336,54.426 U5.8 ; U10.7@134.239,61.722 134.874,61.722 135.89,60.706 135.89,55.753 133.782,53.645 U4.8 136.322,49.27 U5.2
  Top Layer w1: C2.1@74.676,76.454 84.074,76.454 89.281,81.661 89.281,99.568 87.63,101.219 CY1.1 ; U7.8 97.81,69.997 109.22,81.407 U6.14 109.22,103.759 107.696,105.283 DC1.3@103.759,105.283
  Bottom Layer w0.5: R8.2 115.997,78.786 116.678,78.105 116.678,77.632 117.475,76.835 R9.2@118.618,76.835
  Bottom Layer w0.75: R12.2 93.045,59.136 94.915,61.006 R5.2 95.758,62.484 96.52,61.722 U7.7 ; U2.3 U2.2 ; R14.2 105.237,59.263 107.107,61.133 R13.2 107.107,63.927 107.442,64.262 U8.8 ; R6.2 R7.2 R8.2 ; U8.7 U8.8 ; U3.3 U3.2 ; R19.2 116.921,59.263 118.791,61.133 R18.2 120.922,62.484 U9.7 U9.8 121.684,65.296 ; U4.3 U4.2 ; R24.2 129.113,59.009 130.983,60.879 R23.2 130.983,63.927 131.318,64.262 U10.8 ; U10.7 U10.8 ; U5.3 U5.2 ; R29.1 140.797,59.263 142.667,61.133 R28.1 144.798,62.484 U11.7 ; U8.8 110.998,64.262 113.157,66.421 120.65,66.421 121.684,65.387 121.684,65.296 ; 121.684,65.296 122.809,66.421 132.969,66.421 133.622,65.768 U10.8
  Bottom Layer w1: CY1.1 75.057,101.219 72.517,103.759 72.517,106.553 74.549,108.585 95.25,108.585 98.425,105.41 110.49,105.41 113.411,108.331 144.018,108.331 144.78,107.569 144.78,105.41 P9.4@144.526,105.156 ; U7.7 U7.8 ; R6.2@109.22,78.74 R6.2 U6.14 ; R9.2 R10.2
pads on no net: DC1.4 P8.3 P9.1 P9.3 P9.5 P9.6 P9.7 P9.8 U1.4 U2.1 U3.1 U4.1 U5.1 U6.12 U7.1 U7.4 U8.1 U8.4 U9.1 U9.4 U10.1 U10.4 U11.1 U11.4

## Polygon pours and split planes (outlines as drawn)
GND on Bottom Layer "GROUND" (solid, remove dead copper, shelved, pour order 1000): 50.927,112.649 172.974,112.649 172.974,26.035 159.512,26.035 50.927,26.035 50.927,112.649
GND on Bottom Layer "GROUND" (solid, remove dead copper, shelved, pour order 1000): 50.927,112.649 172.974,112.649 172.974,26.035 50.927,26.035 50.927,112.649
GND on Bottom Layer "Bottom Layer-No Net" (solid, remove dead copper, shelved, pour order 1000): 50.292,113.411 173.736,113.411 173.736,25.4 172.593,25.4 50.292,25.4 50.292,113.411
GND on Bottom Layer "Bottom Layer-No Net" (solid, remove dead copper, shelved, pour order 1000): 50.292,113.411 173.863,113.411 173.863,25.4 170.561,25.4 50.292,25.4 50.292,113.411
GND on Bottom Layer "Bottom Layer-No Net" (solid, remove dead copper, shelved, pour order 1000): 50.292,113.284 50.419,113.411 173.863,113.411 173.863,25.4 50.292,25.4 50.292,113.284
GND on Bottom Layer "GROUND" (solid, remove dead copper, shelved, pour order 1000): 50.292,113.411 173.863,113.411 173.863,25.4 50.292,25.4 50.292,113.284 50.419,113.411 64.262,113.411 50.165,113.411

## Other copper
Bottom Layer:
  pour cut-out: 146.431,109.22 160.02,109.22 171.831,97.409 171.831,94.742 170.307,94.742 168.91,93.345 160.401,101.854 147.447,101.854 146.05,103.251 146.05,108.839
  pour cut-out: 74.295,110.871 105.664,110.871 107.061,109.474 107.061,107.188 80.899,107.188 78.867,105.156 73.787,105.156 73.787,108.458 72.898,109.347 74.295,110.744
  pour cut-out: 129.413,82.423 135.382,76.454 135.382,70.104 125.095,70.104 123.698,68.707 122.047,70.358 122.047,81.407 123.063,82.423
  pour cut-out: 90.043,65.405 147.955,65.405 147.955,42.669 147.195,42.674 90.043,42.674

## Silkscreen, mask and mechanical layers (free items; w line width, h text height)
Mechanical 1:
  lines w0.254: 50.927,26.035 50.927,112.649 172.974,112.649 172.974,26.035 50.927,26.035

## Text inside footprints (layer, text, board x,y; h text height)
P11: Top Overlay "12" at 165.968,77.782 h1.27 r90; Top Overlay "1" at 168.508,78.798 h1.27 r90; Top Overlay "1" at 168.508,77.782 h1.27 r90; Top Overlay "1" at 168.508,60.51 h1.27 r90; Top Overlay "2" at 165.968,60.51 h1.27 r90